# Altium PCB EUS1_Outline_5_trial07_3.PcbDoc
Units mm, origin at the board's own origin, x right, y up, seen from the top; angles counter-clockwise.
Board outline 95.45 x 90.3 mm, 4 copper layers (Top Layer, Signal Layer 1, Ground, Bottom Layer), stack 1.677 mm thick; 247 components, 187 nets, 935 pads, 3 vias.
Unrouted connection lines stored in the file: 629.
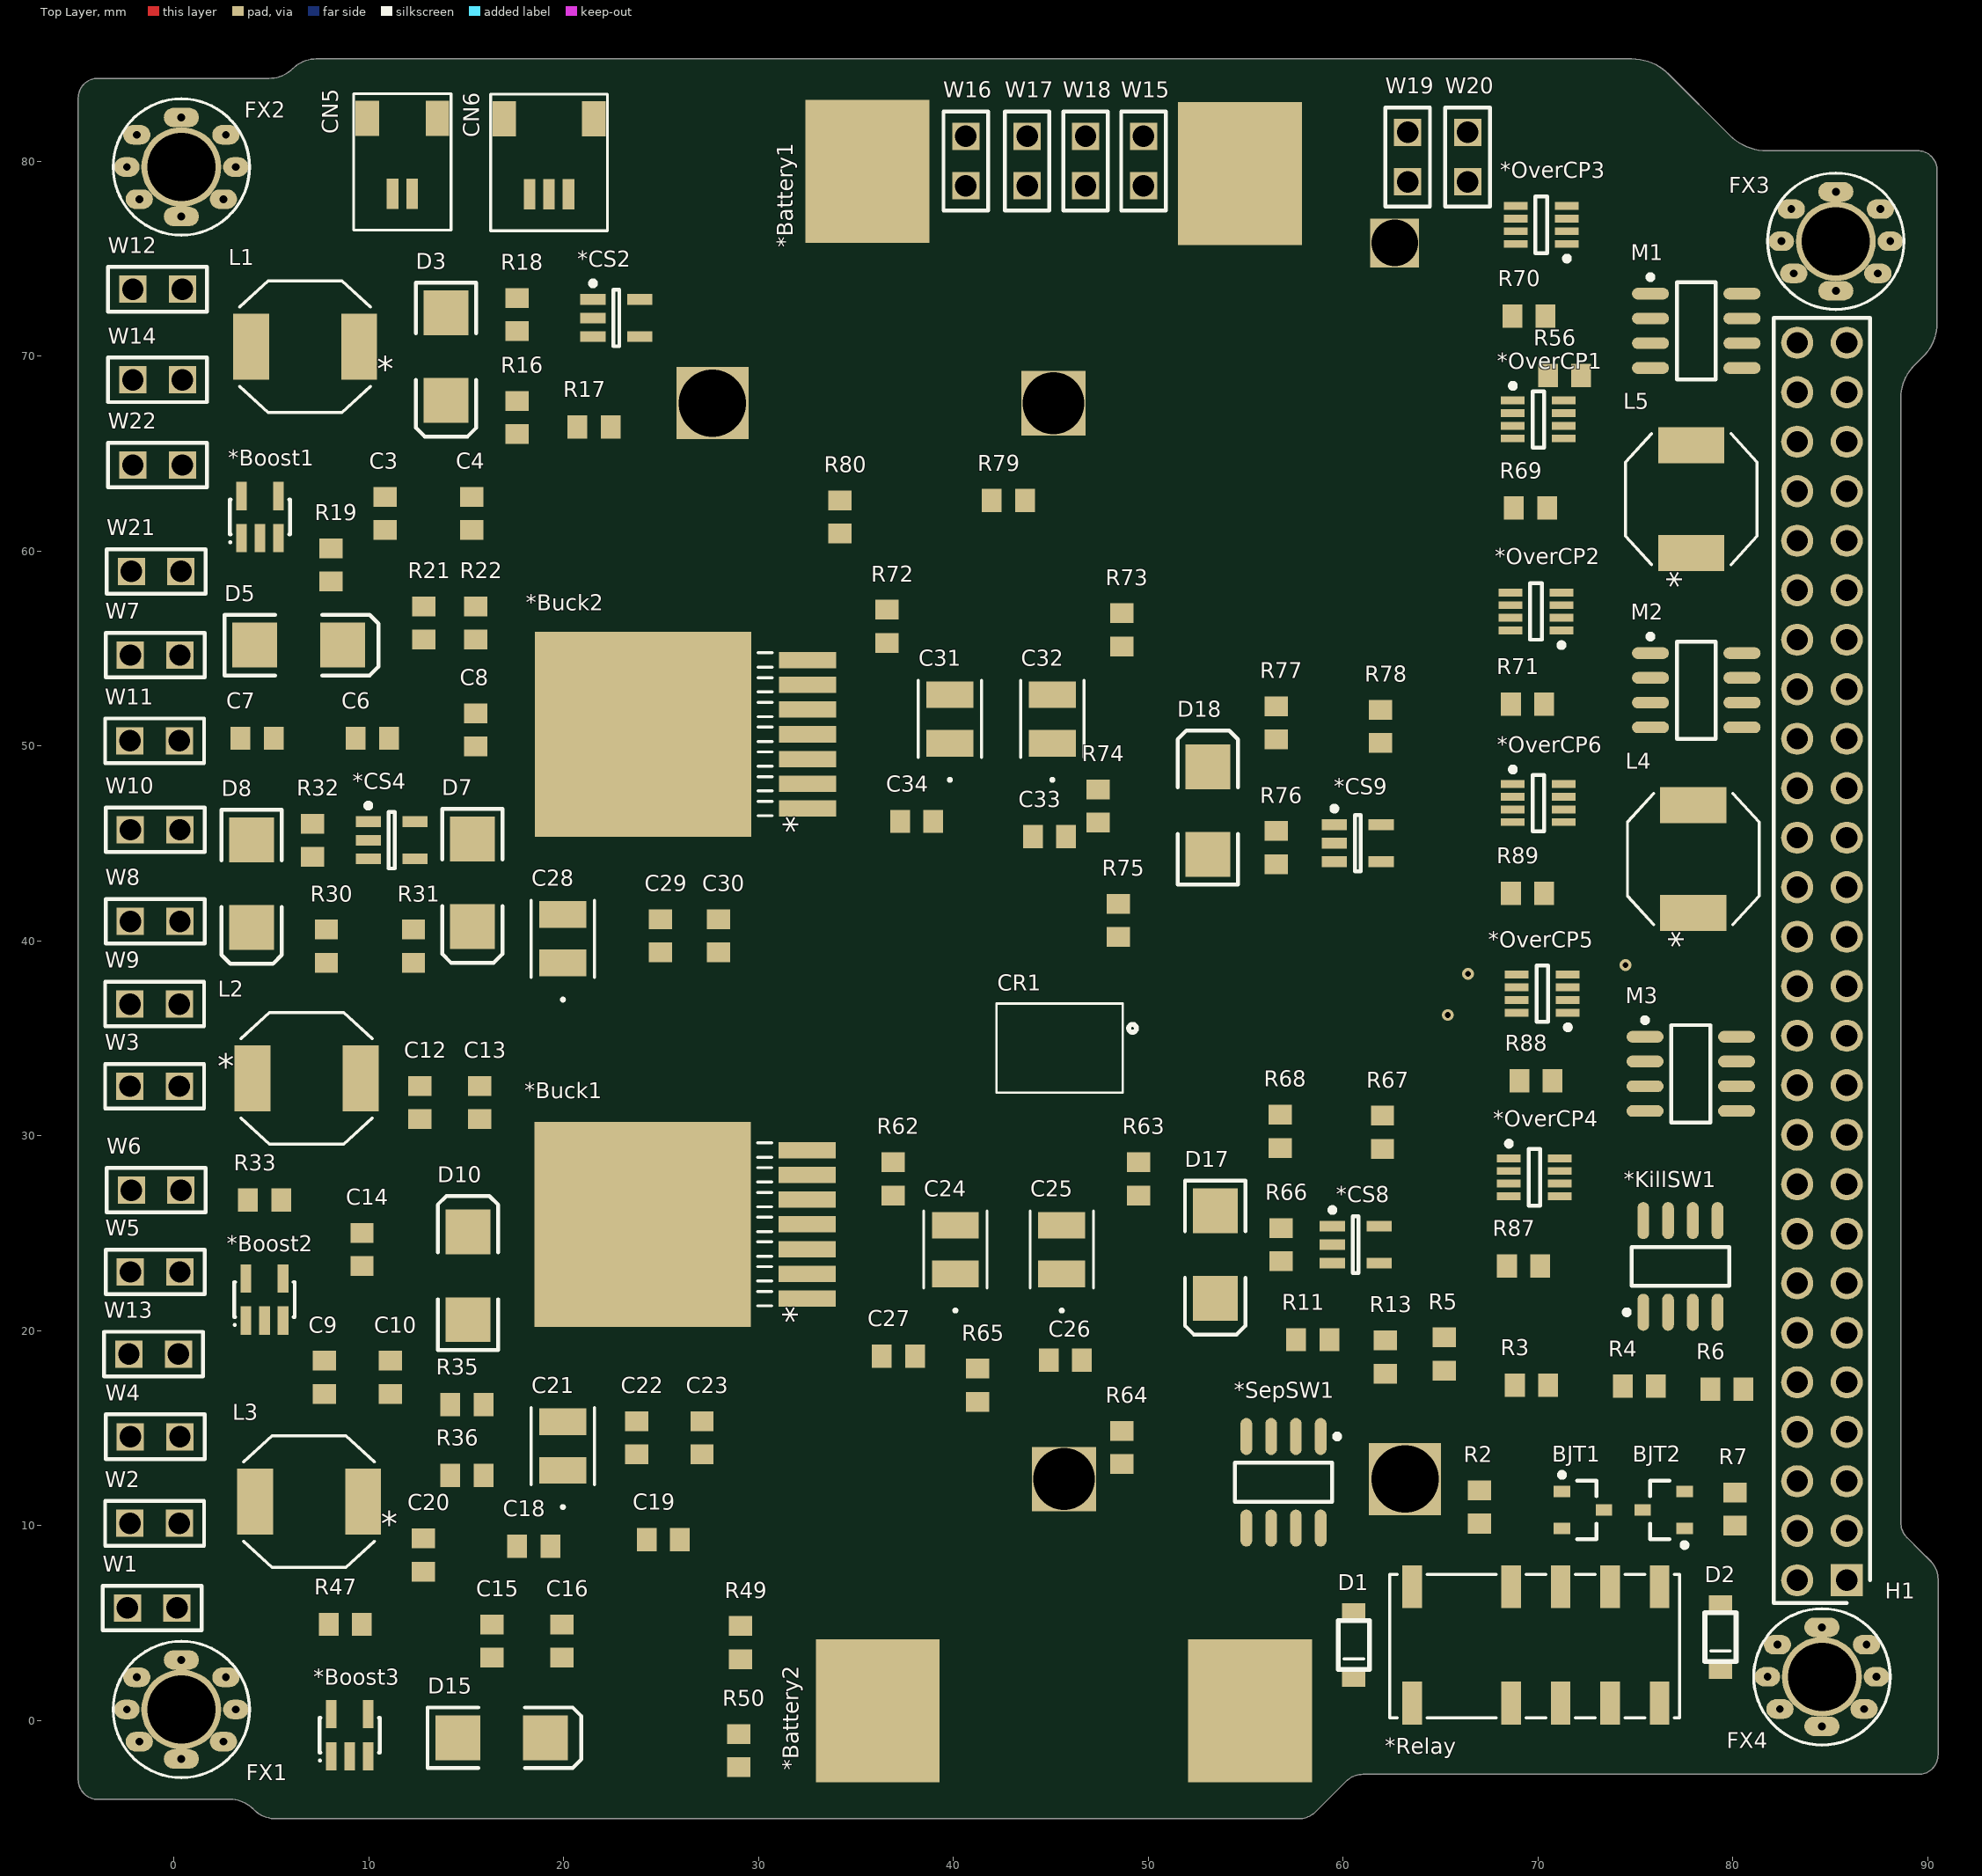
[diagram p0: Top Layer view]
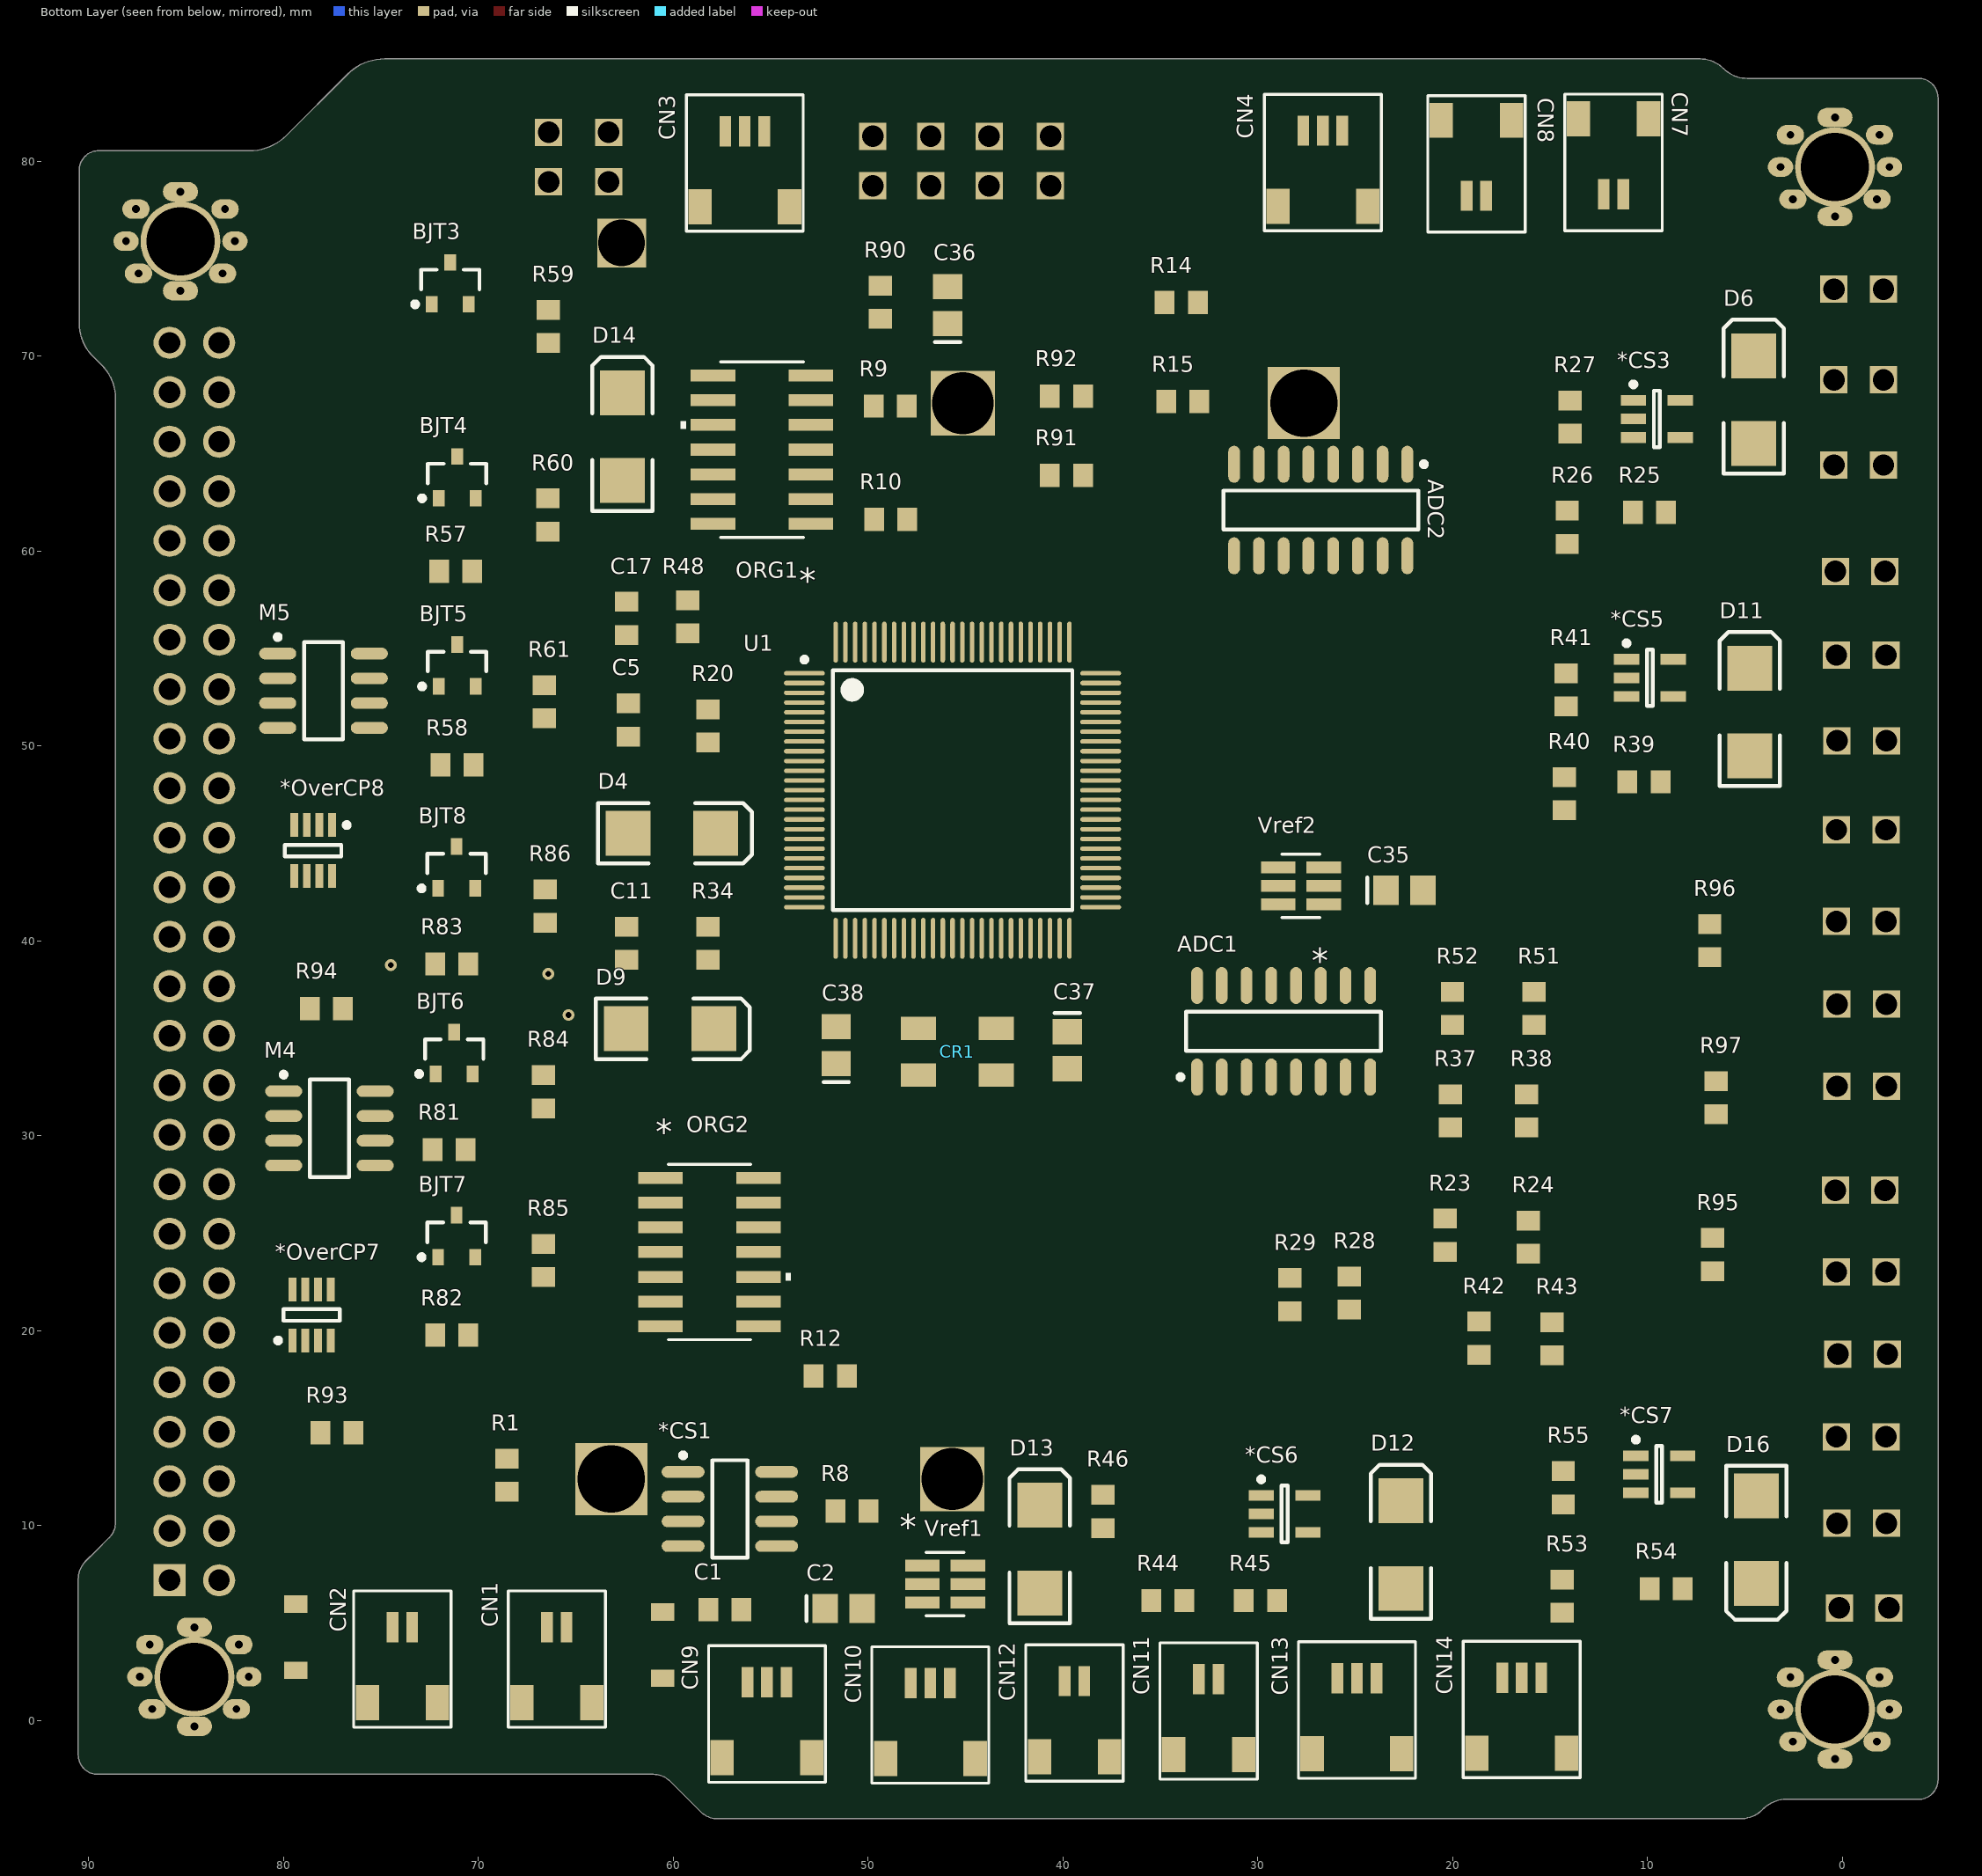
[diagram p1: Bottom Layer view, seen from below]
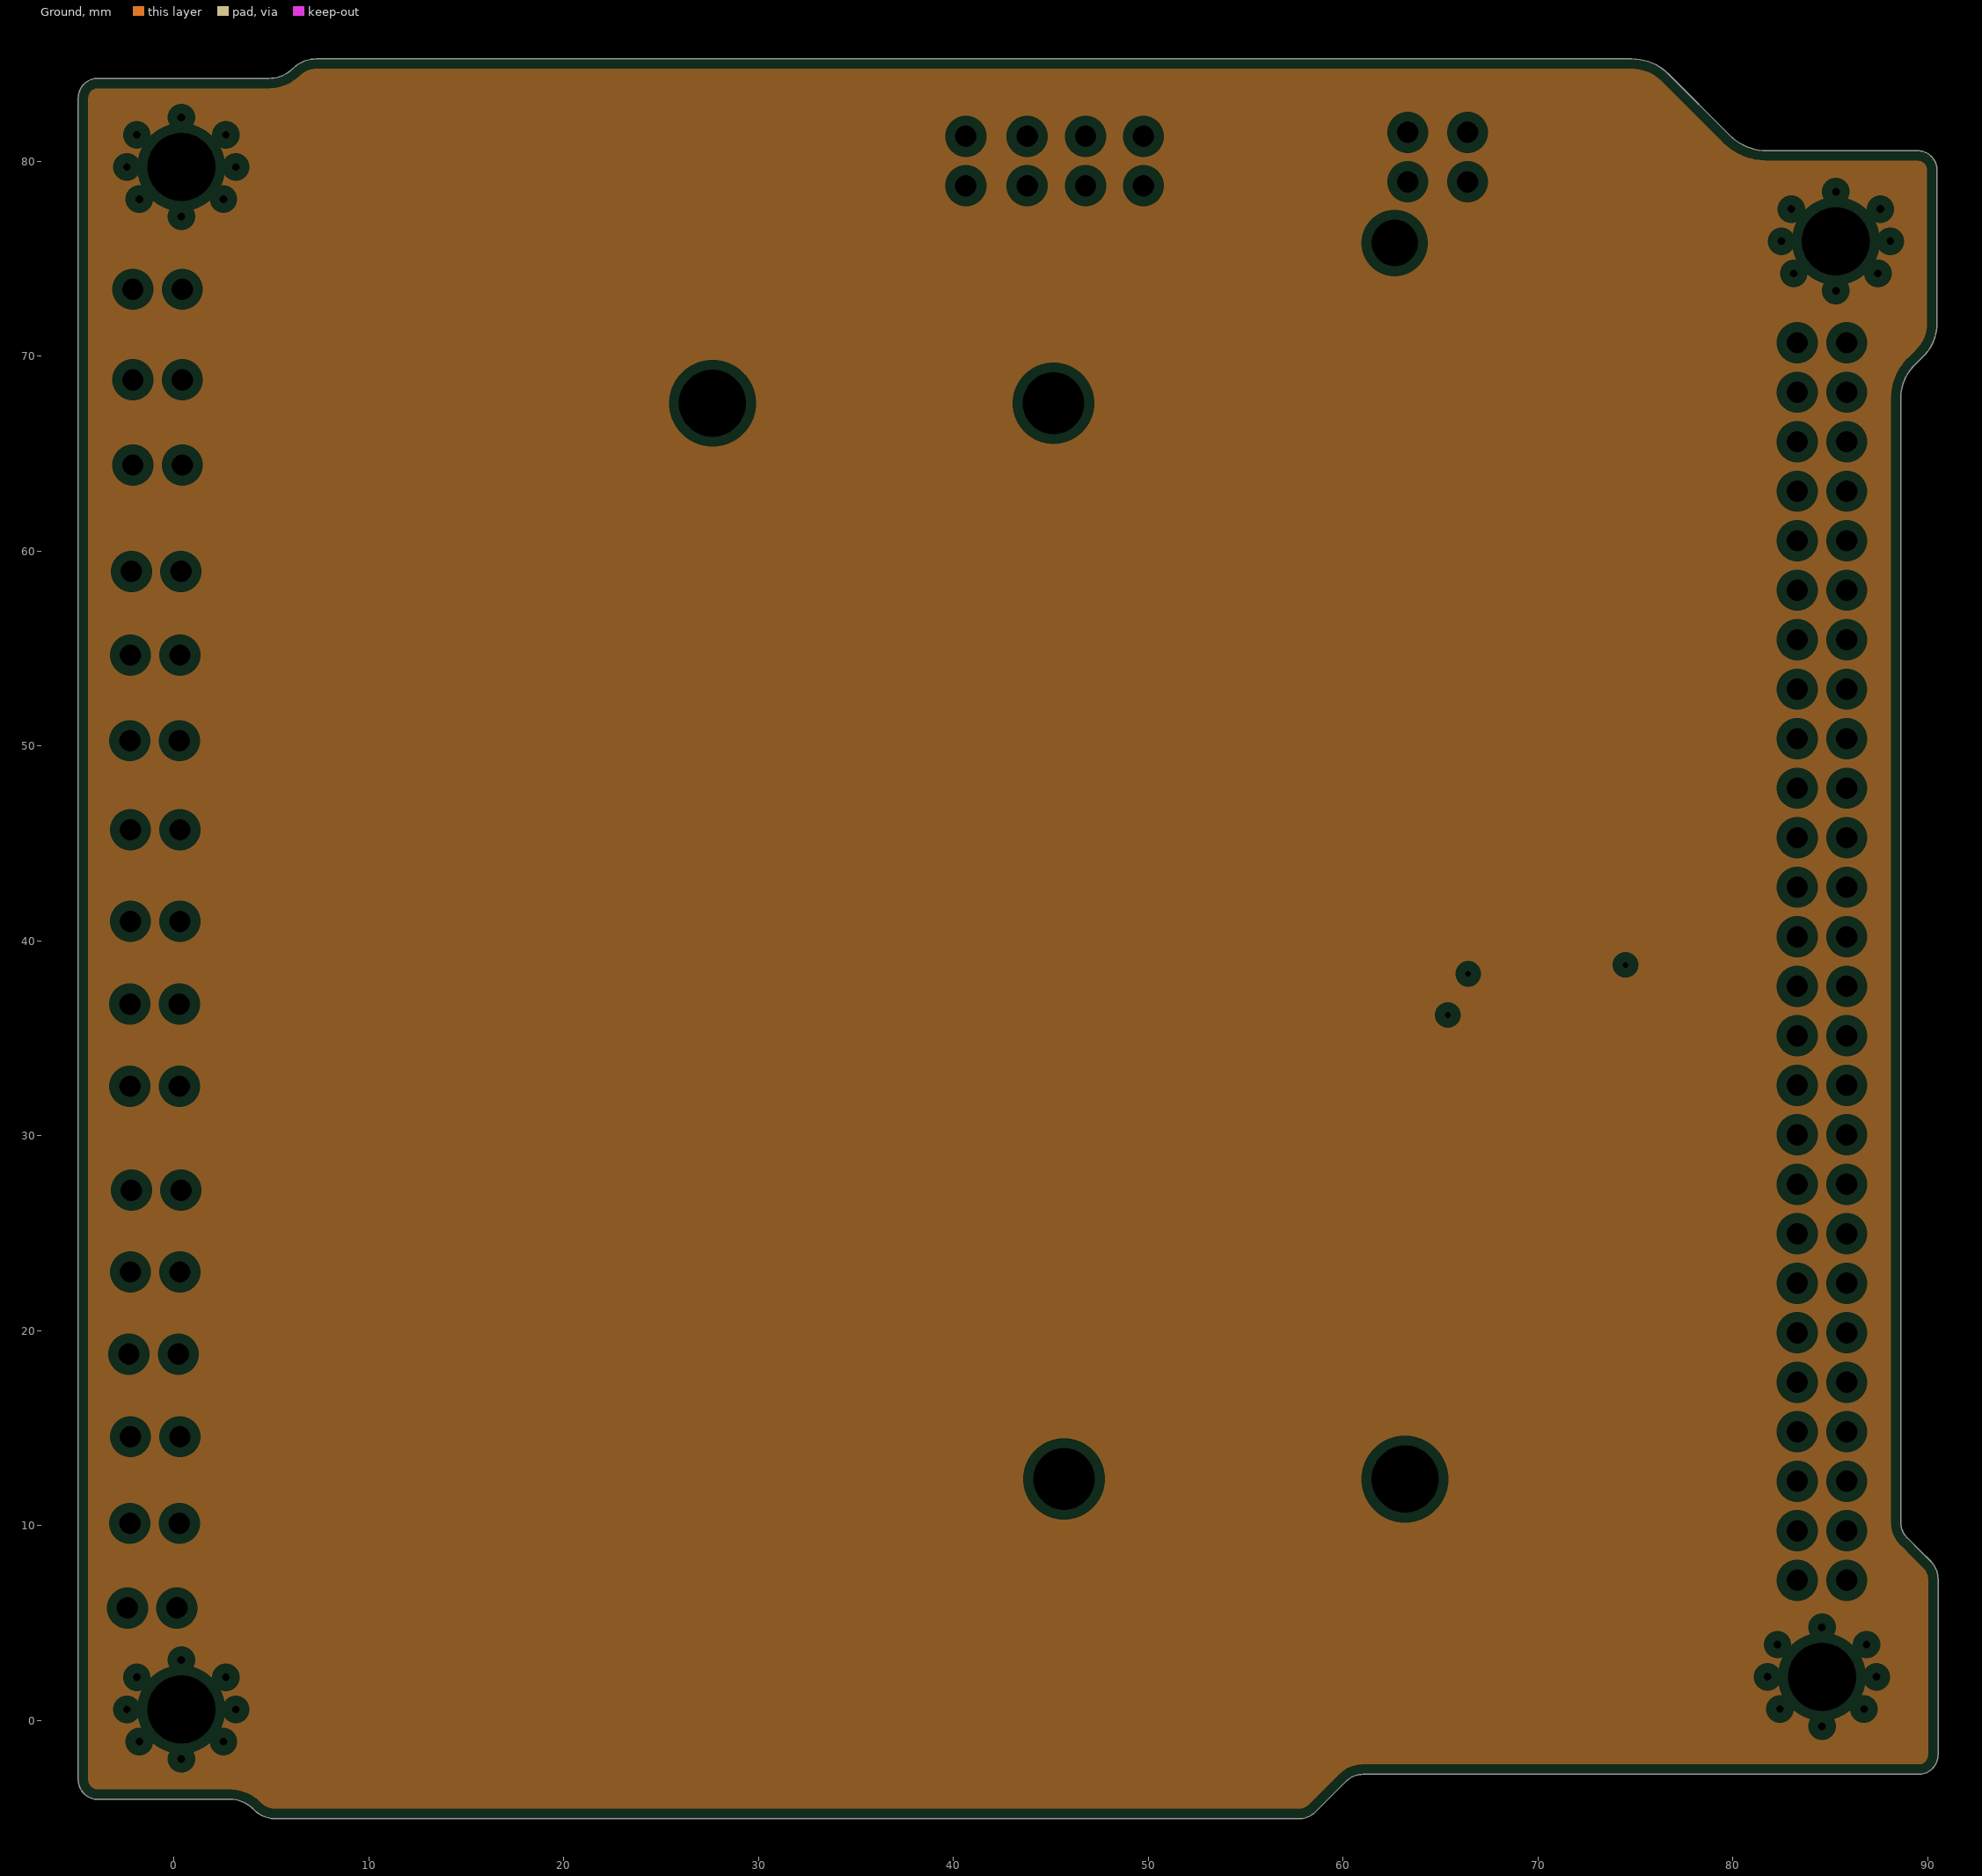
[diagram p2: Ground, clearances drawn from the general rule]

## Layer stack, top to bottom
Top Solder: solder mask 0.0102, Solder Resist, Dk 3.5
Top Layer: signal copper 0.0356
Dielectric 1: prepreg 0.1702, FR-4, Dk 4.35
Signal Layer 1: signal copper 0.036
Dielectric 3: core 1.1938, FR-4, Dk 4.35
Ground: plane copper 0.036
Routing: core 0.1702, FR-4, Dk 4.35
Bottom Layer: signal copper 0.0356
Bottom Solder: solder mask 0.0102, Solder Resist, Dk 3.5

## Board outline
2.9,-4.05 cw(c2.9,-5.668) 4.044,-4.524 4.096,-4.576 ccw(c5.24,-3.432) 5.24,-5.05 57.73,-5.05 ccw(c57.73,-3.831) 58.592,-4.693 60.158,-3.127 cw(c61.02,-3.989) 61.02,-2.77 89.54,-2.77 ccw(c89.54,-1.77) 90.54,-1.77 90.54,7.25 ccw(c89.248,7.25) 90.162,8.163 89.625,8.7 88.952,9.373 cw(c89.728,10.15) 88.63,10.15 88.63,67.85 cw(c90.996,67.85) 89.323,69.523 89.797,69.997 ccw(c88.124,71.67) 90.49,71.67 90.49,79.54 ccw(c89.49,79.54) 89.49,80.54 81.75,80.54 cw(c81.75,83.22) 79.855,81.325 76.715,84.465 ccw(c74.82,82.57) 74.82,85.25 7.302,85.25 ccw(c7.302,83.543) 6.095,84.75 cw(c4.888,85.957) 4.888,84.25 -3.91,84.25 ccw(c-3.91,83.25) -4.91,83.25 -4.91,-3.05 ccw(c-3.91,-3.05) -3.91,-4.05

## Design rules (kind name [scope] priority, off if disabled: settings)
Clearance Clearance_3 [OnLayer('Multi-Layer') vs OnLayer('Multi-Layer')] p1: gap=0.02
ComponentClearance [All] p1 off: gap=0.762 collisioncheckmode=3 verticalgap=0.762 showdistances=FALSE
ComponentClearance ComponentClearance_1 [All] p2 off: gap=0.5 collisioncheckmode=3 verticalgap=0.5 showdistances=FALSE
Height Height_1 [InComponent('CN1')] p2 off: minheight=0 maxheight=100 prefheight=12.7
MinimumSolderMaskSliver [All] p1: minsoldermaskwidth=0.102
PlaneClearance [All] p1: clearance=0.508
PlaneConnect [All] p1: planeconnectstyle=Relief reliefexpansion=0.508 reliefentries=4 reliefconductorwidth=0.254 reliefairgap=0.254
PolygonConnect [All] p1: connectstyle=Relief reliefconductorwidth=0.254 reliefentries=4 polygonreliefangle="90 Angle" airgapwidth=0.254
RoutingVias [All] p1: holewidth=0.305 width=0.61 viastyle="Through Hole" minholewidth=0.254 minwidth=0.254 maxholewidth=0.305 maxwidth=0.61
SilkToSilkClearance [All] p1: silktosilkclearance=0.102
SolderMaskExpansion [All] p1: expansion=0.076
Width [All] p1: maxlimit=1.016 minlimit=0.178 preferedwidth=0.3 minimp=50.000000 maximp=50.000000 favimp=50.000000
25 further rules are at their usual default settings.

## Classes and differential pairs
component class Z_line_07: *Boost3 *CS6 *CS7 C15 C16 C17 C18 C19 C20 CN11 CN12 CN13 CN14 D12 D13 D14 D15 D16 L3 R42 R43 R44 R45 R46 R47 R48 R49 R50 R51 R52 R53 R54 R55 R97 W9 W10
component class Y_line_07: *Boost2 *CS4 *CS5 C9 C10 C11 C12 C13 C14 CN7 CN8 CN9 CN10 D7 D8 D9 D10 D11 L2 R28 R29 R30 R31 R32 R33 R34 R35 R36 R37 R38 R39 R40 R41 R96 W7 W8
component class X_line_07: *Boost1 *CS2 *CS3 C3 C4 C5 C6 C7 C8 CN5 CN6 D3 D4 D5 D6 L1 R14 R15 R16 R17 R18 R19 R20 R21 R22 R23 R24 R25 R26 R27 R95 W5 W6
component class Microcontroller_07: C36 C37 C38 CR1 R90 R91 R92 U1 W15 W16 W17 W18 W19 W20 W21 W22
component class Buck_5V_line_07: *Buck2 *CS9 *OverCP4 *OverCP5 *OverCP6 *OverCP8 BJT6 BJT7 BJT8 C28 C29 C30 C31 C32 C33 C34 D18 L5 M3 M5 ORG2 R72 R73 R74 R75 R76 R77 R78 R79 R80 R81 R82 R83 R84 R85 R86 R87 R88 R89 R94 W13 W14
component class Fixture_07: FX1 FX2 FX3 FX4 H1
component class Buck_3.3V_line_07: *Buck1 *CS8 *OverCP1 *OverCP2 *OverCP3 *OverCP7 BJT3 BJT4 BJT5 C21 C22 C23 C24 C25 C26 C27 D17 L4 M1 M2 M4 ORG1 R56 R57 R58 R59 R60 R61 R62 R63 R64 R65 R66 R67 R68 R69 R70 R71 R93 W11 W12
component class Battery_07: *Battery1 *Battery2 *CS1 *KillSW1 *Relay *SepSW1 BJT1 BJT2 C1 C2 CN1 CN2 CN3 CN4 D1 D2 R1 R2 R3 R4 R5 R6 R7 R8 R9 R10 R11 R12 R13 Vref1 W1 W2 W3 W4
component class ADC_REF_07: ADC1 ADC2 C35 Vref2

## Components (designator, comment, footprint, x,y, rotation, side; value= is the part's Value field where it differs from the comment)
*Battery1 "Battery1" Battery1 67.183,-3.175 r90 top
*Battery2 "Battery2" BATTERY2 66.65,-3.175 r90 top
*Boost1 "LMR6242" DBV005 4.42,61.747 r0 top
*Boost2 "Boost2" DBV005 4.648,21.59 r0 top
*Boost3 "Boost3" DBV005 9.017,-0.762 r0 top
*Buck1 "LM22679" TJ7A-M 24.105,25.451 r90 top
*Buck2 "LM22679" TJ7A-M 24.13,50.597 r90 top
*CS1 "LT1787HVCS8#TRPBF" LT-S8-8_N 57.099,10.846 r180 bottom
*CS2 "CS2" LT-S5-5-TSOT-23_N 22.708,71.958 r0 top
*CS3 "CS3" LT-S5-5-TSOT-23_N 9.525,66.777 r180 bottom
*CS4 "CS4" LT-S5-5-TSOT-23_N 11.176,45.161 r0 top
*CS5 "CS5" LT-S5-5-TSOT-23_N 9.881,53.492 r180 bottom
*CS6 "CS6" LT-S5-5-TSOT-23_N 28.626,10.592 r180 bottom
*CS7 "CS7" LT-S5-5-TSOT-23_N 9.398,12.624 r180 bottom
*CS8 "LT6106HS5#TRMPBF" LT-S5-5-TSOT-23_N 60.655,24.409 r0 top
*CS9 "LT6106HS5#TRMPBF" LT-S5-5-TSOT-23_N 60.757,45.009 r0 top
*KillSW1 "IRF7329TRPBF" SO8_L 77.318,23.292 r90 top
*OverCP1 "LTC4361ITS8-1#TRMPBF" LT-TS8-8-TSOT-23_V 70.028,66.751 r0 top
*OverCP2 "LTC4361ITS8-1#TRMPBF" LT-TS8-8-TSOT-23_V 69.901,56.896 r180 top
*OverCP3 "LTC4361ITS8-1#TRMPBF" LT-TS8-8-TSOT-23_V 70.18,76.733 r180 top
*OverCP4 "LTC4361ITS8-1#TRMPBF" LT-TS8-8-TSOT-23_V 69.825,27.864 r0 top
*OverCP5 "LTC4361ITS8-1#TRMPBF" LT-TS8-8-TSOT-23_V 70.231,37.287 r180 top
*OverCP6 "LTC4361ITS8-1#TRMPBF" LT-TS8-8-TSOT-23_V 70.028,47.066 r0 top
*OverCP7 "LTC4361ITS8-2#TRMPBF" LT-TS8-8-TSOT-23_V 78.562,20.803 r90 bottom
*OverCP8 "LTC4361ITS8-2#TRMPBF" LT-TS8-8-TSOT-23_V 78.486,44.628 r270 bottom
*Relay "G6SK-2G DC3" "G6SK-2G DC3" 63.043,-0.254 r0 top
*SepSW1 "IRF7329TRPBF" SO8_L 56.947,12.217 r270 top
ADC1 "MCP3008T-I/SL" SOIC16_L 28.677,35.357 r90 bottom
ADC2 "MCP3008T-I/SL" SOIC16_L 26.772,62.103 r270 bottom
BJT1 "MMBT2222A" SOT-23A_L 72.314,10.795 r0 top
BJT2 "MMBT2222A" SOT-23A_L 76.454,10.795 r180 top
BJT3 "MMBT2222A" SOT-23A_L 71.45,73.736 r90 bottom
BJT4 "MMBT2222A" SOT-23A_L 71.095,63.779 r90 bottom
BJT5 "MMBT2222A" SOT-23A_L 71.095,54.127 r90 bottom
BJT6 "MMBT2222A" SOT-23A_L 71.247,34.239 r90 bottom
BJT7 "MMBT2222A" SOT-23A_L 71.12,24.841 r90 bottom
BJT8 "MMBT2222A" SOT-23A_L 71.12,43.764 r90 bottom
C1 "GRM188R71H472KA0" RC0805N 57.353,5.69 r0 bottom
C2 "1uF" 0805 51.257,5.74 r180 bottom
C3 "GRM155R71H103KA8" RC0805N 10.846,61.925 r90 top
C4 "22uF" RC0805N 15.291,61.925 r90 top
C5 "220nF" RC0805N 62.306,51.333 r90 bottom
C6 "10uF" RC0805N 10.185,50.394 r0 top
C7 "GRM155R71H103KA8" RC0805N 4.267,50.394 r180 top
C8 "330pF" RC0805N 15.494,50.825 r270 top
C9 "GRM155R71H103KA8" RC0805N 7.722,17.602 r90 top
C10 "22uF" RC0805N 11.1,17.602 r90 top
C11 "220nF" RC0805N 62.408,39.878 r270 bottom
C12 "10uF" RC0805N 12.624,31.699 r270 top
C13 "GRM155R71H103KA8" RC0805N 15.697,31.699 r270 top
C14 "330nF" RC0805N 9.652,24.155 r90 top
C15 "GRM155R71H103KA8" RC0805N 16.332,4.064 r90 top
C16 "22uF" RC0805N 19.914,4.064 r90 top
C17 "100uF" RC0805N 62.408,56.54 r90 bottom
C18 "10uF" RC0805N 18.466,8.941 r180 top
C19 "GRM155R71H103KA8" RC0805N 25.121,9.271 r180 top
C20 "330nF" RC0805N 12.802,8.484 r90 top
C21 "22uF" TAJB 19.964,14.072 r90 top
C22 "10uF" RC0805N 23.749,14.503 r270 top
C23 "10uF" RC0805N 27.102,14.503 r270 top
C24 "100uF" TAJB 40.107,24.155 r90 top
C25 "100uF" TAJB 45.568,24.155 r90 top
C26 "10nF" RC0805N 45.745,18.491 r0 top
C27 "1uF" RC0805N 37.186,18.694 r180 top
C28 "22uF" TAJB 19.964,40.107 r90 top
C29 "10uF" RC0805N 24.968,40.259 r270 top
C30 "10uF" RC0805N 27.94,40.259 r270 top
C31 "100uF" TAJB 39.827,51.384 r90 top
C32 "100uF" TAJB 45.085,51.384 r90 top
C33 "10nF" RC0805N 44.933,45.339 r0 top
C34 "1uF" RC0805N 38.125,46.126 r180 top
C35 "1uF" 0805 22.479,42.596 r180 bottom
C36 "1uF" 0805 45.923,72.619 r90 bottom
C37 "22uF" 0805 39.776,34.392 r270 bottom
C38 "22uF" 0805 51.638,34.646 r90 bottom
CN1 "SM02B-SRSS" 2pins 68.478,-0.356 r180 bottom
CN2 "SM02B-SRSS" 2pins 76.403,-0.356 r180 bottom
CN3 "SM03B-SRSS" 3pins 59.334,76.403 r180 bottom
CN4 "SM03B-SRSS" 3pins 29.667,76.429 r180 bottom
CN5 "SM02B-SRSS" 2pins 14.224,83.464 r180 top
CN6 "SM03B-SRSS" 3pins 22.25,83.439 r180 top
CN7 "SM02B-SRSS" 2pins 9.246,83.439 r0 bottom
CN8 "SM02B-SRSS" 2pins 16.281,83.363 r0 bottom
CN9 "SM03B-SRSS" 3pins 58.191,-3.175 r180 bottom
CN10 "SM03B-SRSS" 3pins 49.809,-3.226 r180 bottom
CN11 "SM02B-SRSS" 2pins 35.027,-3.023 r180 bottom
CN12 "SM02B-SRSS" 2pins 41.91,-3.124 r180 bottom
CN13 "SM03B-SRSS" 3pins 27.915,-2.972 r180 bottom
CN14 "SM03B-SRSS" 3pins 19.456,-2.946 r180 bottom
CR1 "ABM3B-16.000MHZ" Crystal 47.422,35.509 r180 top
D1 "MMSD459A" GeneralDiode 60.554,5.563 r180 top
D2 "MMSD459A" GeneralDiode 79.375,5.969 r180 top
D3 "D Schottky" SMB 13.97,69.977 r270 top
D4 "D Schottky" SMB 60.071,45.517 r180 bottom
D5 "D Schottky" SMB 6.401,55.169 r0 top
D6 "D Schottky" SMB 4.547,67.767 r90 bottom
D7 "D Schottky" SMB 15.316,42.977 r270 top
D8 "D Schottky" SMB 3.988,42.926 r270 top
D9 "D Schottky" SMB 60.173,35.484 r180 bottom
D10 "D Schottky" SMB 15.088,22.809 r90 top
D11 "D Schottky" SMB 4.75,51.74 r90 bottom
D12 "D Schottky" SMB 22.657,9.017 r90 bottom
D13 "D Schottky" SMB 41.199,8.788 r90 bottom
D14 "D Schottky" SMB 62.611,65.862 r90 bottom
D15 "D Schottky" SMB 16.815,-0.889 r0 top
D16 "D Schottky" SMB 4.42,9.271 r270 bottom
D17 "D Schottky" SMB 53.442,23.901 r270 top
D18 "D Schottky" SMB 53.061,46.685 r90 top
FX1 "Fixure Hole" FixureHole 0.381,0.559 r0 top
FX2 "Fixure Hole" FixureHole 0.381,79.705 r0 top
FX3 "Fixure Hole" FixureHole 85.293,75.895 r0 top
FX4 "Fixure Hole" FixureHole 84.582,2.235 r0 top
H1 "ESQ12014GD" ? 85.852,7.188 r90 top (schematic designator B1)
L1 "4.7uH" IND_SPM6530 6.731,70.485 r180 top
L2 "4.7uF" IND_SPM6530 6.807,32.944 r0 top
L3 "4.7uF" IND_SPM6530 6.934,11.227 r180 top
L4 "4.7uH" IND_SPM6530 77.978,44.196 r90 top
L5 "4.7uH" IND_SPM6530 77.876,62.662 r90 top
M1 "IRF7329TRPBF" SO8_L 78.13,71.298 r0 top
M2 "IRF7329TRPBF" SO8_L 78.13,52.857 r0 top
M3 "IRF7329TRPBF" SO8_L 77.851,33.172 r0 top
M4 "IRF7329TRPBF" SO8_L 77.648,30.378 r180 bottom
M5 "IRF7329TRPBF" SO8_L 77.953,52.832 r180 bottom
ORG1 "SN74LV32ADR" D14-M 55.448,65.202 r0 bottom
ORG2 "SN74LV32ADR" D14-M 58.141,24.028 r180 bottom
R1 "330" RC0805N 68.529,12.573 r90 bottom
R2 "10K" RC0805N 67.005,10.947 r90 top
R3 "10K" RC0805N 69.672,17.196 r180 top
R4 "10K" RC0805N 75.209,17.145 r0 top
R5 "10K" RC0805N 65.202,18.796 r270 top
R6 "10K" RC0805N 79.705,16.993 r180 top
R7 "10K" RC0805N 80.112,10.846 r90 top
R8 "330" RC0805N 50.825,10.744 r180 bottom
R9 "4.7K" RC0805N 48.87,67.437 r180 bottom
R10 "4.7K" RC0805N 48.844,61.62 r0 bottom
R11 "100K" RC0805N 58.445,19.533 r180 top
R12 "R_sense" RC0805N 51.943,17.678 r180 bottom
R13 "100K" RC0805N 62.179,18.644 r90 top
R14 "RC0805FR" RC0805N 33.934,72.746 r0 bottom
R15 "RC0805FR" RC0805N 33.858,67.666 r180 bottom
R16 "1K" RC0805N 17.602,66.853 r270 top
R17 "R_sense" RC0805N 21.565,66.37 r180 top
R18 "1K" RC0805N 17.602,72.136 r270 top
R19 "1M" RC0805N 8.052,59.284 r270 top
R20 "RC0805FR" RC0805N 58.217,51.029 r270 bottom
R21 "51K" RC0805N 12.827,56.312 r90 top
R22 "10K" RC0805N 15.494,56.312 r90 top
R23 "4.7K" RC0805N 20.396,24.892 r270 bottom
R24 "4.7K" RC0805N 16.129,24.79 r90 bottom
R25 "RC0805FR" RC0805N 9.906,61.976 r180 bottom
R26 "RL0805FR-070R1L" RC0805N 14.122,61.214 r270 bottom
R27 "RC0805FR" RC0805N 13.97,66.878 r270 bottom
R28 "RC0805FR" RC0805N 25.298,21.92 r90 bottom
R29 "RC0805FR" RC0805N 28.346,21.844 r90 bottom
R30 "RC0805FR" RC0805N 7.823,39.726 r270 top
R31 "RL0805FR-070R1L" RC0805N 12.294,39.726 r270 top
R32 "RC0805FR" RC0805N 7.112,45.161 r270 top
R33 "10K" RC0805N 4.648,26.695 r180 top
R34 "RC0805FR" RC0805N 58.217,39.878 r270 bottom
R35 "260K" RC0805N 15.037,16.205 r180 top
R36 "47K" RC0805N 15.037,12.573 r180 top
R37 "4.7K" RC0805N 20.117,31.267 r90 bottom
R38 "4.7K" RC0805N 16.205,31.267 r270 bottom
R39 "RC0805FR" RC0805N 10.185,48.158 r180 bottom
R40 "RL0805FR-070R1L" RC0805N 14.275,47.549 r270 bottom
R41 "RC0805FR" RC0805N 14.173,52.883 r270 bottom
R42 "RC0805FR" RC0805N 18.644,19.609 r90 bottom
R43 "RC0805FR" RC0805N 14.91,19.583 r270 bottom
R44 "RC0805FR" RC0805N 34.62,6.147 r180 bottom
R45 "RL0805FR-070R1L" RC0805N 29.87,6.147 r0 bottom
R46 "RC0805FR" RC0805N 37.948,10.719 r270 bottom
R47 "10K" RC0805N 8.788,4.928 r180 top
R48 "RC0805FR" RC0805N 59.258,56.617 r90 bottom
R49 "260K" RC0805N 29.083,3.988 r270 top
R50 "47K" RC0805N 28.981,-1.549 r90 top
R51 "4.7K" RC0805N 15.824,36.525 r90 bottom
R52 "4.7K" RC0805N 20.015,36.525 r270 bottom
R53 "RC0805FR" RC0805N 14.376,6.375 r270 bottom
R54 "RL0805FR-070R1L" RC0805N 9.042,6.756 r0 bottom
R55 "RC0805FR" RC0805N 14.326,11.938 r270 bottom
R56 "1K" RC0805N 71.374,69.012 r180 top
R57 "1K" RC0805N 71.171,58.953 r180 bottom
R58 "1K" RC0805N 71.095,49.022 r180 bottom
R59 "10K" RC0805N 66.421,71.526 r90 bottom
R60 "10K" RC0805N 66.446,61.849 r90 bottom
R61 "10K" RC0805N 66.624,52.273 r90 bottom
R62 "10K" RC0805N 36.906,27.788 r90 top
R63 "1K" RC0805N 49.505,27.788 r270 top
R64 "1.6K" RC0805N 48.641,13.995 r90 top
R65 "150" RC0805N 41.25,17.196 r90 top
R66 "1K" RC0805N 56.82,24.409 r90 top
R67 "R_sense" RC0805N 62.027,30.175 r90 top
R68 "1K" RC0805N 56.769,30.226 r90 top
R69 "RL0805FR-070R1L" RC0805N 69.621,62.205 r180 top
R70 "RL0805FR-070R1L" RC0805N 69.545,72.06 r0 top
R71 "RL0805FR-070R1L" RC0805N 69.469,52.146 r0 top
R72 "10K" RC0805N 36.601,56.134 r90 top
R73 "1K" RC0805N 48.641,55.956 r90 top
R74 "3K" RC0805N 47.422,46.914 r90 top
R75 "150" RC0805N 48.463,41.046 r90 top
R76 "1K" RC0805N 56.566,44.78 r90 top
R77 "R_sense" RC0805N 56.566,51.181 r90 top
R78 "1K" RC0805N 61.925,51.003 r270 top
R79 "4.7K" RC0805N 42.824,62.586 r180 top
R80 "15K" RC0805N 34.188,61.747 r270 top
R81 "1K" RC0805N 71.501,29.286 r180 bottom
R82 "1K" RC0805N 71.374,19.761 r180 bottom
R83 "1K" RC0805N 71.374,38.811 r180 bottom
R84 "10K" RC0805N 66.675,32.258 r270 bottom
R85 "10K" RC0805N 66.675,23.597 r270 bottom
R86 "10K" RC0805N 66.573,41.783 r270 bottom
R87 "RL0805FR-070R1L" RC0805N 69.266,23.317 r180 top
R88 "RL0805FR-070R1L" RC0805N 69.901,32.817 r0 top
R89 "RL0805FR-070R1L" RC0805N 69.469,42.443 r180 top
R90 "10K" RC0805N 49.378,72.771 r90 bottom
R91 "10K" RC0805N 39.827,63.881 r0 bottom
R92 "10K" RC0805N 39.827,67.945 r0 bottom
R93 "RL0805FR-070R1L" RC0805N 77.267,14.757 r0 bottom
R94 "RL0805FR-070R1L" RC0805N 77.8,36.525 r180 bottom
R95 "51K" RC0805N 6.655,23.901 r270 bottom
R96 "51K" RC0805N 6.807,40.005 r90 bottom
R97 "51K" RC0805N 6.477,31.953 r90 bottom
U1 "ATmega2560-16AU" 100A_M 45.669,47.727 r180 bottom
Vref1 "ADR3450ARJZ-R2" RJ_6-M 46.05,6.985 r180 bottom
Vref2 "ADR3450ARJZ-R2" RJ_6-M 27.788,42.824 r0 bottom
W1 "Jumper" RAD-0.1 -1.118,5.766 r0 top
W2 "Jumper" RAD-0.1 -0.991,10.109 r0 top
W3 "Jumper" RAD-0.1 -0.991,32.537 r0 top
W4 "Jumper" RAD-0.1 -0.965,14.554 r0 top
W5 "Jumper" RAD-0.1 -0.965,23.012 r180 top
W6 "Jumper" RAD-0.1 -0.914,27.203 r180 top
W7 "Jumper" RAD-0.1 -0.965,54.661 r180 top
W8 "Jumper" RAD-0.1 -0.965,40.996 r180 top
W9 "Jumper" RAD-0.1 -0.991,36.754 r0 top
W10 "Jumper" RAD-0.1 -0.965,45.695 r180 top
W11 "Jumper" RAD-0.1 -0.991,50.267 r0 top
W12 "Jumper" RAD-0.1 -0.838,73.431 r180 top
W13 "Jumper" RAD-0.1 -1.041,18.796 r0 top
W14 "Jumper" RAD-0.1 -0.838,68.783 r0 top
W15 "Jumper" RAD-0.1 49.759,80.01 r270 top
W16 "Jumper" RAD-0.1 40.64,80.01 r90 top
W17 "Jumper" RAD-0.1 43.79,80.01 r90 top
W18 "Jumper" RAD-0.1 46.787,80.01 r90 top
W19 "Jumper" RAD-0.1 63.322,80.213 r90 top
W20 "Jumper" RAD-0.1 66.396,80.213 r270 top
W21 "Jumper" RAD-0.1 -0.914,58.953 r0 top
W22 "Jumper" RAD-0.1 -0.838,64.414 r0 top

## Footprints (in the part's own frame and the unit in brackets; to place one, negate y for a bottom-side part, rotate by r counter-clockwise, add the part's x,y. Pads: shape width x height; smd on the part's side, far side on the other; paste and mask are expansions set on the pad)
2pins [mm]
  rect 0.6x1.55 smd: 1(2,5.137) 2(3,5.137)
  rect 1.2x1.8 smd: 3(0.7,1.263) 4(4.3,1.263)
  silkscreen extent 0,0 5,7
3pins [mm]
  rect 0.6x1.55 smd: 1(2,5.137) 2(3,5.137) 3(4,5.137)
  rect 1.2x1.8 smd: 4(0.7,1.263) 5(5.3,1.263)
  silkscreen extent 0,0 6,7
100A_M [mm]
  oval 2.1x0.23 smd: 1(-7.6,6) 2(-7.6,5.5) 3(-7.6,5) 4(-7.6,4.5) 5(-7.6,4) 6(-7.6,3.5) 7(-7.6,3) 8(-7.6,2.5) 9(-7.6,2) 10(-7.6,1.5) 11(-7.6,1) 12(-7.6,0.5) 13(-7.6,0) 14(-7.6,-0.5) 15(-7.6,-1) 16(-7.6,-1.5) 17(-7.6,-2) 18(-7.6,-2.5) 19(-7.6,-3) 20(-7.6,-3.5) 21(-7.6,-4) 22(-7.6,-4.5) 23(-7.6,-5) 24(-7.6,-5.5) 25(-7.6,-6) 51(7.6,-6) 52(7.6,-5.5) 53(7.6,-5) 54(7.6,-4.5) 55(7.6,-4) 56(7.6,-3.5) 57(7.6,-3) 58(7.6,-2.5) 59(7.6,-2) 60(7.6,-1.5) 61(7.6,-1) 62(7.6,-0.5) 63(7.6,0) 64(7.6,0.5) 65(7.6,1) 66(7.6,1.5) 67(7.6,2) 68(7.6,2.5) 69(7.6,3) 70(7.6,3.5) 71(7.6,4) 72(7.6,4.5) 73(7.6,5) 74(7.6,5.5) 75(7.6,6)
  oval 0.23x2.1 smd: 26(-6,-7.6) 27(-5.5,-7.6) 28(-5,-7.6) 29(-4.5,-7.6) 30(-4,-7.6) 31(-3.5,-7.6) 32(-3,-7.6) 33(-2.5,-7.6) 34(-2,-7.6) 35(-1.5,-7.6) 36(-1,-7.6) 37(-0.5,-7.6) 38(0,-7.6) 39(0.5,-7.6) 40(1,-7.6) 41(1.5,-7.6) 42(2,-7.6) 43(2.5,-7.6) 44(3,-7.6) 45(3.5,-7.6) 46(4,-7.6) 47(4.5,-7.6) 48(5,-7.6) 49(5.5,-7.6) 50(6,-7.6) 76(6,7.6) 77(5.5,7.6) 78(5,7.6) 79(4.5,7.6) 80(4,7.6) 81(3.5,7.6) 82(3,7.6) 83(2.5,7.6) 84(2,7.6) 85(1.5,7.6) 86(1,7.6) 87(0.5,7.6) 88(0,7.6) 89(-0.5,7.6) 90(-1,7.6) 91(-1.5,7.6) 92(-2,7.6) 93(-2.5,7.6) 94(-3,7.6) 95(-3.5,7.6) 96(-4,7.6) 97(-4.5,7.6) 98(-5,7.6) 99(-5.5,7.6) 100(-6,7.6)
  silkscreen extent -7.73,-6.15 6.15,6.82, body extent -7,-7 7,7, height 1.2
0805 [mm]
  rect 1.3x1.5 smd: 1(-0.95,0) 2(0.95,0)
  silkscreen extent -1.9,-0.65 -1.9,0.65
Battery1 [mm]
  rect 7.34x6.35 smd: 1(3.67,31.06) 2(3.67,11.95)
  rect 3.7x3.7 hole 3.45: 3(15.56,4)
  rect 3.3x3.3 hole 3.17: 4(15.56,21.505)
BATTERY2 [mm]
  rect 7.34x6.35 smd: 3(82.65,31.06) 4(82.55,11.938)
  rect 2.5x2.5 hole 2.39: 5(78.98,4)
  rect 3.3x3.3 hole 3.17: 6(70.76,21.505)
  rect 3.7x3.7 hole 3.45: 7(70.76,39.01)
Crystal [mm]
  rect 1.8x1.2 smd far side: 1(0,0) 2(4,0) 3(4,2.4) 4(0,2.4)
  silkscreen extent -1.98,-1.27 5.21,3.3
D14-M [mil]
  rect 90x24 smd: 1(-99,150) 2(-99,100) 3(-99,50) 4(-99,0) 5(-99,-50) 6(-99,-100) 7(-99,-150) 8(99,-150) 9(99,-100) 10(99,-50) 11(99,0) 12(99,50) 13(99,100) 14(99,150)
  silkscreen extent -83,-177 164,177, body extent 0,0 10,10, height 10
DBV005 [mm]
  rect 0.55x1.45 smd: 1(-0.95,-1.075) 2(0,-1.075) 3(0.95,-1.075) 4(0.95,1.075) 5(-0.95,1.075)
  silkscreen extent -1.57,-1.35 1.55,0.9
FixureHole [mm]
  round 4.1 hole 3.5: 1(0,0)
  oval 1.4x1 hole 0.4: 2(-2.286,1.651) 4(-2.159,-1.651) 6(2.159,-1.651) 8(2.286,1.651)
  oval 1.3x1 hole 0.4: 3(-2.794,0) 7(2.794,0)
  oval 1.8x1 hole 0.4: 5(0,-2.54) 9(0,2.54)
  silkscreen extent -3.5,-3.5 3.5,3.5
"G6SK-2G DC3" [mm] "RELAY TELECOM DPDT 2A 3V"
  rect 1x2.2 smd: 1(0.508,1.143) 2(0.508,7.112) 3(5.588,1.143) 4(8.128,1.143) 5(10.668,1.143) 6(13.208,1.143) 7(13.208,7.112) 8(10.668,7.112) 9(8.128,7.112) 10(5.588,7.112)
  silkscreen extent -0.63,0.38 14.22,7.75
GeneralDiode [mm]
  rect 1.2x0.9 all layers, no hole: 1(0,0) 2(0,3.4)
  silkscreen extent -0.8,0.45 0.8,2.95
IND_SPM6530 [mm]
  rect 1.85x3.4 smd: 1(-2.775,0) 2(2.775,0)
  silkscreen extent -3.37,-3.38 3.37,3.38, body extent 0,0 0.25,0.25, height 0.25
LT-S5-5-TSOT-23_N [mm]
  rect 1.3x0.55 smd: 1(-1.2,0.95) 2(-1.2,0) 3(-1.2,-0.95) 4(1.2,-0.95) 5(1.2,0.95)
  silkscreen extent -1.32,-1.45 0.15,1.9, body extent -0.87,-1.45 0.87,1.45, height 1
LT-S8-8_N [mm]
  oval 2.2x0.6 smd: 1(-2.4,1.905) 2(-2.4,0.635) 3(-2.4,-0.635) 4(-2.4,-1.905) 5(2.4,-1.905) 6(2.4,-0.635) 7(2.4,0.635) 8(2.4,1.905)
  silkscreen extent -2.53,-2.5 0.9,2.88, body extent -2,-2.5 2,2.5, height 1.76
LT-TS8-8-TSOT-23_V [mm]
  rect 1.22x0.4 smd: 1(-1.31,0.975) 2(-1.31,0.325) 3(-1.31,-0.325) 4(-1.31,-0.975) 5(1.31,-0.975) 6(1.31,-0.325) 7(1.31,0.325) 8(1.31,0.975)
  silkscreen extent -1.43,-1.45 0.3,1.85, body extent -0.87,-1.45 0.88,1.45, height 1
RAD-0.1 [mm] "Radial Cap, Thru-Hole; 2 Leads; 0.1 in Pin Spacing"
  rect 1.4x1.4 hole 1.1: 1(-1.27,0) 2(1.27,0)
  silkscreen extent -2.54,-1.14 2.54,1.14
RC0805N [mil]
  rect 40x47 smd: 1(-33.5,0) 2(33.5,0)
  body extent 0,0 10,10, height 10
RJ_6-M [mil]
  rect 70x24 smd: 1(-46,37.4) 2(-46,0) 3(-46,-37.4) 4(46,-37.4) 5(46,0) 6(46,37.4)
  silkscreen extent -39,-64 38,64, body extent 0,0 10,10, height 10
SMB [mm]
  rect 2.3x2.3 smd: 1(-2.25,0) 2(2.25,0)
  silkscreen extent -3.8,-1.55 4.1,1.55
SO8_L [mm]
  oval 1.9x0.6 smd: 1(-2.35,1.905) 2(-2.35,0.635) 3(-2.35,-0.635) 4(-2.35,-1.905) 5(2.35,-1.905) 6(2.35,-0.635) 7(2.35,0.635) 8(2.35,1.905)
  silkscreen extent -2.47,-2.5 1,2.88, body extent -2,-2.5 2,2.5, height 1.75
SOIC16_L [mm]
  oval 1.9x0.6 smd: 1(-2.35,4.445) 2(-2.35,3.175) 3(-2.35,1.905) 4(-2.35,0.635) 5(-2.35,-0.635) 6(-2.35,-1.905) 7(-2.35,-3.175) 8(-2.35,-4.445) 9(2.35,-4.445) 10(2.35,-3.175) 11(2.35,-1.905) 12(2.35,-0.635) 13(2.35,0.635) 14(2.35,1.905) 15(2.35,3.175) 16(2.35,4.445)
  silkscreen extent -2.47,-5 1,5.42, body extent -2,-5 2,5, height 1.91
SOT-23A_L [mm]
  rect 0.85x0.6 smd: 1(-1.075,0.95) 2(-1.075,-0.95) 3(1.075,0)
  silkscreen extent -1.2,-1.5 0.7,1.92, body extent -0.7,-1.5 0.7,1.5, height 1.09
TAJB [mil]
  rect 54x95 smd: 1(-49,0) 2(49,0)
  silkscreen extent -126,-64 78,64, body extent 0,0 10,10, height 10
TJ7A-M [mil]
  rect 33x115 smd: 1(-150,-330.5) 2(-100,-330.5) 3(-50,-330.5) 4(0,-330.5) 5(50,-330.5) 6(100,-330.5) 7(150,-330.5)
  rect 414x438 smd: 8(0,2)
  silkscreen extent -165,-259 164,-230, body extent 0,0 10,10, height 10
? [mm]
  rect 1.65x1.65 / inner round 1.65 / far side rect 1.65x1.65 hole 1.1: 1(0,0)
  round 1.65 hole 1.1: 2(0,2.54) 3(2.54,0) 4(2.54,2.54) 5(5.08,0) 6(5.08,2.54) 7(7.62,0) 8(7.62,2.54) 9(10.16,0) 10(10.16,2.54) 11(12.7,0) 12(12.7,2.54) 13(15.24,0) 14(15.24,2.54) 15(17.78,0) 16(17.78,2.54) 17(20.32,0) 18(20.32,2.54) 19(22.86,0) 20(22.86,2.54) 21(25.4,0) 22(25.4,2.54) 23(27.94,0) 24(27.94,2.54) 25(30.48,0) 26(30.48,2.54) 27(33.02,0) 28(33.02,2.54) 29(35.56,0) 30(35.56,2.54) 30(35.56,2.54) 31(38.1,0) 32(38.1,2.54) 32(38.1,2.54) 33(40.64,0) 34(40.64,2.54) 34(40.64,2.54) 35(43.18,0) 36(43.18,2.54) 36(43.18,2.54) 37(45.72,0) 38(45.72,2.54) 38(45.72,2.54) 39(48.26,0) 40(48.26,2.54) 40(48.26,2.54) 41(50.8,0) 42(50.8,2.54) 43(53.34,0) 44(53.34,2.54) 45(55.88,0) 46(55.88,2.54) 47(58.42,0) 48(58.42,2.54) 49(60.96,0) 50(60.96,2.54) 51(63.5,0) 52(63.5,2.54)
  silkscreen extent -1.17,-1.2 64.77,3.75

## Part data
*Boost1 *Boost2 *Boost3: library part LMR62421XMFE/NOPB, "Switching Voltage Regulators SIMPLE SWITCHER 24V out,2.1A SU Vltg Reg"
*Buck1 *Buck2: "step down converter"
*CS1: "Single Channel, High Side Current Sense, 60 V Supply Operation, Precision Operational Amplifier, 0.115 MHz Typical GBW, 2.5 to 60 V, 8-Pin SOIC (S8-8), Commercial, Pb-Free, Reel"
*CS2 *CS3 *CS4 *CS5 *CS6 *CS7: library part LT6106HS5#TRMPBF, "Single Channel, Low Cost, High Side Current Sense Operational Amplifier, 0.2 MHz Typical GBW, 5-Pin SOT-23 (S5-5), High Temperature / Automotive, Pb-Free, Mini Reel"
*CS8 *CS9: "Single Channel, Low Cost, High Side Current Sense Operational Amplifier, 0.2 MHz Typical GBW, 5-Pin SOT-23 (S5-5), High Temperature / Automotive, Pb-Free, Mini Reel"
*KillSW1 *SepSW1 M1 M2 M3 M4 M5: "P-MOSFET, DUAL PCh -12V 9.2A"
*OverCP1 *OverCP2 *OverCP3 *OverCP4 *OverCP5 *OverCP6: "Overvoltage / Overcurrent Protection Controller, 2.5 to 80 V Vin, 8-pin SOT23 (TS8-8), -40 to 85 degC, Pb-Free, Mini Tape and Reel"
*OverCP7 *OverCP8: library part LTC4361ITS8-1#TRMPBF, "Overvoltage / Overcurrent Protection Controller, 2.5 to 80 V Vin, 8-pin SOT23 (TS8-8), -40 to 85 degC, Pb-Free, Mini Tape and Reel"
*Relay: library part "Omron G6SK-2G", "RELAY TELECOM DPDT 2A 3V"
ADC1 ADC2: "Analog  to Digital Converter, 10BIT 8 Channel"
BJT1 BJT2: library part 2STF1360, "BJT, NPN"
BJT3 BJT4 BJT5 BJT6 BJT7 BJT8: library part 2STF1360, "BJT"
C1: "Ceramic Capacitor 47uF 0603"
C2 C35: library part GRM155R71H103KA8, "Ceramic Capacitor 0402"
C3 C7 C9 C13 C15 C19: "Ceramic Capacitor 0402"
C4 C8 C10 C14 C16 C20: library part GRM155R71H103KA8, "Ceramic Capacitor"
C5 C6 C11 C12 C17 C18: library part GRM188R71H472KA0, "Ceramic Capacitor 47uF 0603"
C21 C28: library part TAJB226M010RNJ, "Tantalum Capacitor, 22uF"
C22 C23 C29 C30: library part C0805C106K8PACTU, "Ceramic Capacitor 10uF"
C24: library part TAJB226M010RNJ, "Tantalum Capacitor. 100uF"
C25 C31: library part TAJB226M010RNJ, "Tantalum Capacitor, 100uF"
C26 C33: library part GRM155R71H103KA8, "Ceramic Capacitor 10nF"
C27 C34: library part GRM188R61C105KA9, "Ceramic Capacitor 1uF"
C32: library part TAJB226M010RNJ, "Tantalum Capacitor,100uF"
C36: library part GRM155R71H103KA8, "Ceramic Capacitor 1uF"
C37 C38: library part GRM155R71H103KA8, "Ceramic Capacitor 22uF"
CN1 CN2 CN5 CN7 CN8 CN11 CN12: library part 2Pin_Connector, "CONN HEADER SH 2POS SIDE 1MM TIN"
CN3 CN4 CN6 CN9 CN10 CN13 CN14: library part 3PIN_Connector, "CONN HEADER SH 3POS SIDE 1MM TIN"
CR1: library part ABM3B-16.000MHZ-10-1-U-T, "CRYSTAL 16.0000MHZ 10PF SMD"
D1 D2: "Diode General Purpose, SOD-123"
D3 D4 D5 D6 D7 D8 D9 D10 D11 D12 D13 D14 D15 D16 D18: "Schottky Diode, 1A"
D17: "Schottky Diode, 3A"
FX1 FX2 FX3 FX4: "Header, 9-Pin"
H1: "2x20 way standard long pin PCB socket Samtec ESQ Series 2.54mm 40 Way 2 Row Straight PCB Socket Through Hole Board to Board"
L1 L2 L3 L4 L5: library part SPM6530T-4R7M, "Inductor, 4.7uH"
ORG1 ORG2: "OR GATE, 4 Channels"
R1 R2 R3 R4 R5 R6 R7 R8 R9 R10 R11 R13 R16 R18 R19 R21 R22 R23 R24 R33 R35 R36 R37 R38 R47 R49 R50 R51 R52 R66 R68 R76 R78 R95 R96 R97: library part RC0805FR, "Thick Film Resistors 0805"
R12 R17 R67 R77: library part RL0805FR-070R1L, "Sense Resistor 100m ohm 0805"
R14 R15 R20 R25 R27 R28 R29 R30 R32 R34 R39 R41 R42 R43 R44 R46 R48 R53 R55: "Thick Film Resistors 0805"
R26 R31 R40 R45 R54 R69 R70 R71 R87 R88 R89 R93 R94: "Sense Resistor 100m ohm 0805"
R56 R57 R58 R63 R73 R81 R82 R83: library part RC0805FR, "Thick Film Resistors, 1k ohm"
R59 R60 R61 R72 R84 R85 R86: library part RC0805FR, "Thick Film Resistors, 10k ohm"
R62 R90 R92: library part RC0805FR, "Thick Film Resistors 10k ohm"
R64: library part RC0805FR, "Thick Film Resistors, 1.6kohm"
R65 R75: library part RC0805FR, "Thick Film Resistors, 150 ohm"
R74: library part RC0805FR, "Thick Film Resistors, 3k ohm"
R79: library part RC0805FR, "Resistors 0805, 4.7k ohm"
R80: library part RC0805FR, "Resistors 0805, 15k ohm"
R91: library part RC0805FR, "Thick Film Resistors 10kohm"
U1: "8-bit AVR Microcontroller, 4.5-5.5V, 256KB Flash, 4KB EEPROM, 8KB SRAM, 86 GPIO pins, 100-pin TQFP, Industrial Grade (-40°C to 85°C), Pb-Free"
Vref1 Vref2: library part ADR3412ARJZ-R2, "Voltage Reference"
W1 W2 W3 W4 W5 W6 W7 W8 W9 W10 W11 W12 W13 W14 W15 W16 W17 W18 W19 W20 W21 W22: "Jumper Wire"

## Via types
v1: diameter 0.6, hole 0.3, Top Layer to Bottom Layer, 3 vias

## Nets (pads, with @x,y where several pads share a name; then routed paths per layer and width w, separated by ;. In a path a pad name is that pad's centre, name@x,y a point inside that pad or via, vN(x,y) a via of type N, cw(c..) or ccw(c..) an arc to the next point about the centre after c; other vN are vias at no path point)
CONV_X_OUT: C6.2 C7.2 C8.2 D5.2 R21.1 R23.1 R25.2 R26.2
CONV_Y_OUT: C12.2 C13.2 C14.2 D10.2 R35.1 R37.1 R39.2 R40.2
CONV_Z_OUT: C18.2 C19.2 C20.2 D15.2 R49.1 R51.1 R53.2 R54.2
DRAIN6: *OverCP4.6 M3.5 M3.6 R87.1
DRAIN_2: *OverCP1.6 M1.5 M1.6 R69.1
EPS_3.3V_VCC: *OverCP7.2 H1.10 M4.1 M4.3
EPS_5V_VCC: *CS2.5 *CS3.5 *CS4.5 *CS5.5 *CS6.5 *CS7.5 *CS8.5 *CS9.5 *OverCP8.2 *Relay.1 *Relay.6 ADC1.16 ADC2.16 CN3.1 CN4.1 CN6.1 CN9.1 CN10.1 CN13.1 CN14.1 D1.2 D2.2 H1.8 M5.1 M5.3 ORG1.14 ORG2.14 R5.1 R59.1 R60.1 R61.1 R84.1 R85.1 R86.1 R90.1 R91.2 R92.2 U1.10 U1.31 U1.61 U1.80 U1.100 Vref1.6 Vref2.6 W20.1
  other v1: 74.498,38.76
GND: *Boost1.2 *Boost2.2 *Boost3.2 *Buck1.4 *Buck1.8 *Buck2.4 *Buck2.8 *CS1.4 *CS2.2 *CS3.2 *CS4.2 *CS5.2 *CS6.2 *CS7.2 *CS8.2 *CS9.2 *OverCP1.4 *OverCP2.4 *OverCP3.4 *OverCP4.4 *OverCP5.4 *OverCP6.4 *OverCP7.1 *OverCP7.4 *OverCP8.1 *OverCP8.4 *Relay.4 *Relay.9 ADC1.9 ADC1.14 ADC2.9 ADC2.14 BJT1.3 BJT2.3 BJT3.3 BJT4.3 BJT5.3 BJT6.3 BJT7.3 BJT8.3 C1.1 C2.1 C3.1 C4.1 C5.1 C6.1 C7.1 C9.1 C10.1 C11.1 C12.1 C13.1 C15.1 C16.1 C17.1 C18.1 C19.1 C21.2 C22.1 C23.1 C24.2 C25.2 C27.1 C28.2 C29.1 C30.1 C31.2 C32.2 C34.1 C35.1 C36.1 C37.1 C38.1 CN1.2 CN1.3 CN1.4 CN2.2 CN2.3 CN2.4 CN3.3 CN3.4 CN3.5 CN4.3 CN4.4 CN4.5 CN5.2 CN5.3 CN5.4 CN6.3 CN6.4 CN6.5 CN7.2 CN7.3 CN7.4 CN8.2 CN8.3 CN8.4 CN9.3 CN9.4 CN9.5 CN10.3 CN10.4 CN10.5 CN11.2 CN11.3 CN11.4 CN12.2 CN12.3 CN12.4 CN13.3 CN13.4 CN13.5 CN14.3 CN14.4 CN14.5 CR1.2 CR1.4 D17.1 D18.1 FX1.1 FX1.2 FX1.3 FX1.4 FX1.5 FX1.6 FX1.7 FX1.8 FX1.9 FX2.1 FX2.2 FX2.3 FX2.4 FX2.5 FX2.6 FX2.7 FX2.8 FX2.9 FX3.1 FX3.2 FX3.3 FX3.4 FX3.5 FX3.6 FX3.7 FX3.8 FX3.9 FX4.1 FX4.2 FX4.3 FX4.4 FX4.5 FX4.6 FX4.7 FX4.8 FX4.9 H1.11 H1.12 H1.19 H1.29 H1.30 H1.31 H1.32 H1.45 H1.46 ORG1.2 ORG1.5 ORG1.7 ORG1.10 ORG1.13 ORG2.2 ORG2.5 ORG2.7 R10.2 R15.2 R18.2 R22.2 R24.2 R27.2 R29.2 R32.2 R36.2 R38.2 R41.2 R43.2 R46.2 R50.2 R52.2 R55.2 R62.2 R63.2 R68.2 R72.2 R73.2 R78.2 R79.1 U1.11 U1.32 U1.62 U1.81 U1.99 Vref1.2 Vref1.3 Vref1.5 Vref2.2 Vref2.3 Vref2.5 W2.1 W4.1 W16.2 W18.2 W19.2
ISA_X: *CS2.1 ADC1.3 R18.1
ISA_Y: *CS4.1 ADC1.4 R32.1
ISA_Z: *CS6.1 ADC1.5 R46.1
LOAD1_STATUS: *OverCP3.1 ORG1.3
LOAD2_STATUS: *OverCP1.1 ORG1.6
LOAD3_STATUS: *OverCP2.1 ORG1.8
LOAD5_STATUS: *OverCP5.1 ORG2.3
LOAD6_STATUS: *OverCP4.1 ORG2.6
M_VSA_X: ADC2.8 R14.2 R15.1
M_VSA_Y: ADC1.1 R28.2 R29.1
M_VSA_Z: ADC1.2 R42.2 R43.1
MISO: U1.22 W16.1
MOSI: U1.21 W18.1
Net*Battery1_1: *Battery1.1 *CS1.2 H1.17 R12.1
Net*Battery1_2: *Battery1.2 W3.2
Net*Battery2_3: *Battery2.3 *Battery2.4
Net*Boost1_1: *Boost1.1 D5.1 L1.1
Net*Boost1_3: *Boost1.3 C8.1 R21.2 R22.1 W5.2
Net*Boost1_4: *Boost1.4 R19.1
Net*Boost1_5: *Boost1.5 *CS2.4 C3.2 C4.2 L1.2 R17.1 R19.2
Net*Boost2_1: *Boost2.1 D10.1 L2.1
Net*Boost2_3: *Boost2.3 C14.1 R35.2 R36.1 W7.2
Net*Boost2_4: *Boost2.4 R33.1
Net*Boost2_5: *Boost2.5 *CS4.4 C9.2 C10.2 L2.2 R31.1 R33.2
Net*Boost3_1: *Boost3.1 D15.1 L3.1
Net*Boost3_3: *Boost3.3 C20.1 R49.2 R50.1 W9.2
Net*Boost3_4: *Boost3.4 R47.1
Net*Boost3_5: *Boost3.5 *CS6.4 C15.2 C16.2 L3.2 R45.1 R47.2
Net*Buck1_1: *Buck1.1 C26.2 D17.2 L4.1
Net*Buck1_2: *Buck1.2 C21.1 C22.2 C23.2 W11.2
Net*Buck1_3: *Buck1.3 C26.1
Net*Buck1_5: *Buck1.5 R62.1
Net*Buck1_6: *Buck1.6 R63.1 R64.2
Net*Buck1_7: *Buck1.7 C27.2
Net*Buck2_1: *Buck2.1 C33.2 D18.2 L5.1
Net*Buck2_2: *Buck2.2 C28.1 C29.2 C30.2 W13.2
Net*Buck2_3: *Buck2.3 C33.1
Net*Buck2_5: *Buck2.5 R72.1
Net*Buck2_6: *Buck2.6 R73.1 R74.2
Net*Buck2_7: *Buck2.7 C34.2
Net*CS1_5: *CS1.5 U1.85
Net*CS1_6: *CS1.6 C2.2 Vref1.1
Net*CS1_7: *CS1.7 *KillSW1.5 *KillSW1.6 *KillSW1.7 *KillSW1.8 *SepSW1.1 *SepSW1.3 C1.2 R9.1 R12.2 R13.1
Net*CS2_3: *CS2.3 R16.1
Net*CS3_1: *CS3.1 R27.1 U1.89
Net*CS3_3: *CS3.3 R25.1
Net*CS3_4: *CS3.4 D6.1 R26.1
Net*CS4_3: *CS4.3 R30.1
Net*CS5_1: *CS5.1 R41.1 U1.88
Net*CS5_3: *CS5.3 R39.1
Net*CS5_4: *CS5.4 D11.1 R40.1
Net*CS6_3: *CS6.3 R44.1
Net*CS7_1: *CS7.1 R55.1 U1.87
Net*CS7_3: *CS7.3 R53.1
Net*CS7_4: *CS7.4 D16.1 R54.1
Net*CS8_1: *CS8.1 R68.1 U1.95
Net*CS8_3: *CS8.3 R66.1
Net*CS8_4: *CS8.4 R67.1 U1.94 W12.1
Net*CS9_1: *CS9.1 R78.1 U1.91
Net*CS9_3: *CS9.3 R76.1
Net*CS9_4: *CS9.4 R77.1 W14.1
Net*KillSW1_1: *KillSW1.1 *KillSW1.3 R4.1 W1.2
Net*KillSW1_2: *KillSW1.2 *KillSW1.4 R6.2
Net*OverCP1_2: *OverCP1.2 H1.28 M1.3
Net*OverCP1_3: *OverCP1.3 *OverCP1.5 *OverCP2.3 *OverCP2.5 *OverCP3.3 *OverCP3.5 *OverCP7.3 *OverCP7.5 R69.2 R70.2 R71.2 R93.2 W12.2
Net*OverCP1_7: *OverCP1.7 M1.4
Net*OverCP2_2: *OverCP2.2 H1.20 M2.1
Net*OverCP2_6: *OverCP2.6 M2.7 M2.8 R71.1
Net*OverCP2_7: *OverCP2.7 M2.2
Net*OverCP3_2: *OverCP3.2 H1.18 M1.1
Net*OverCP3_6: *OverCP3.6 M1.7 M1.8 R70.1
Net*OverCP3_7: *OverCP3.7 M1.2
Net*OverCP4_2: *OverCP4.2 H1.26 M3.3
Net*OverCP4_3: *OverCP4.3 *OverCP4.5 *OverCP5.3 *OverCP5.5 *OverCP6.3 *OverCP6.5 *OverCP8.3 *OverCP8.5 R80.2 R87.2 R88.2 R89.2 R94.2 W14.2
Net*OverCP4_7: *OverCP4.7 M3.4
Net*OverCP5_2: *OverCP5.2 H1.24 M3.1
Net*OverCP5_6: *OverCP5.6 M3.7 M3.8 R88.1
Net*OverCP5_7: *OverCP5.7 M3.2
Net*OverCP6_1: *OverCP6.1 ORG1.11
Net*OverCP6_2: *OverCP6.2 H1.22 M2.3
Net*OverCP6_6: *OverCP6.6 M2.5 M2.6 R89.1
Net*OverCP6_7: *OverCP6.7 M2.4
Net*OverCP7_6: *OverCP7.6 M4.5 M4.6 M4.7 M4.8 R93.1
Net*OverCP7_7: *OverCP7.7 M4.2 M4.4
Net*OverCP8_6: *OverCP8.6 M5.5 M5.6 M5.7 M5.8 R94.1
Net*OverCP8_7: *OverCP8.7 M5.2 M5.4
Net*Relay_2: *Relay.2 D1.1 R2.2
Net*Relay_3: *Relay.3 *Relay.10 R3.2
Net*Relay_5: *Relay.5 *Relay.8 R5.2 U1.37
Net*Relay_7: *Relay.7 D2.1 R7.1
Net*SepSW1_2: *SepSW1.2 *SepSW1.4 R11.2 R13.2
Net*SepSW1_5: *SepSW1.5 *SepSW1.6 *SepSW1.7 *SepSW1.8 W11.1 W13.1
NetADC1_10: ADC1.10 U1.54
NetADC1_11: ADC1.11 U1.55
NetADC1_12: ADC1.12 U1.56
NetADC1_13: ADC1.13 U1.53
NetADC2_10: ADC2.10 U1.58
NetADC2_11: ADC2.11 U1.59
NetADC2_12: ADC2.12 U1.60
NetADC2_13: ADC2.13 U1.57
NetB1_41: H1.41 U1.44 W22.2
NetB1_43: H1.43 U1.43 W21.2
NetBJT1_1: BJT1.1 R1.1
NetBJT1_2: BJT1.2 R2.1
NetBJT2_1: BJT2.1 R8.1
NetBJT2_2: BJT2.2 R7.2
NetBJT3_1: BJT3.1 R56.1
NetBJT4_1: BJT4.1 R57.1
NetBJT5_1: BJT5.1 R58.1
NetBJT6_1: BJT6.1 R81.1
NetBJT7_1: BJT7.1 R82.1
NetBJT8_1: BJT8.1 R83.1
NetBJT8_2: BJT8.2 ORG1.12 R86.2
NetC5_2: C5.2 D4.1 R20.1
NetC11_2: C11.2 D9.1 R34.1
NetC17_2: C17.2 D14.1 R48.1
NetC24_1: C24.1 C25.1 L4.2 R65.1 R66.2 R67.2
NetC31_1: C31.1 C32.1 L5.2 R75.1 R76.2 R77.2
NetC36_2: C36.2 R90.2 W15.2
NetC37_2: C37.2 CR1.3 U1.34
NetC38_2: C38.2 CR1.1 U1.33
NetCN1_1: CN1.1 R11.1 W2.2
NetCN2_1: CN2.1 W3.1 W4.2
NetCN5_1: CN5.1 D3.1
NetCN7_1: CN7.1 D7.1
NetCN8_1: CN8.1 D8.1
NetCN11_1: CN11.1 D12.1
NetCN12_1: CN12.1 D13.1
NetD4_2: D4.2 R95.1
NetD6_2: D6.2 W6.1
NetD9_2: D9.2 R96.1
NetD11_2: D11.2 W8.1
NetD14_2: D14.2 R97.1
NetD16_2: D16.2 W10.1
NetR1_2: R1.2 U1.35
NetR3_1: R3.1 R4.2 R6.1
NetR8_2: R8.2 U1.36
NetR9_2: R9.2 R10.1 U1.86
NetR20_2: R20.2 U1.17
NetR34_2: R34.2 U1.18
NetR48_2: R48.2 U1.15
NetR56_2: R56.2 U1.78
NetR57_2: R57.2 U1.77
NetR58_2: R58.2 U1.76
NetR64_1: R64.1 R65.2
NetR74_1: R74.1 R75.2
NetR79_2: R79.2 R80.1 U1.90
NetR81_2: R81.2 U1.74
NetR82_2: R82.2 U1.73
NetR83_2: R83.2 U1.75
NetR91_1: R91.1 W21.1
NetR92_1: R92.1 W22.1
NetR95_2: R95.2 W5.1
NetR96_2: R96.2 W7.1
NetR97_2: R97.2 W9.1
NetW1_1: W1.1 W6.2 W8.2 W10.2
OR1: BJT3.2 ORG1.1 R59.2
OR2: BJT4.2 ORG1.4 R60.2
OR3: BJT5.2 ORG1.9 R61.2
OR5: BJT6.2 ORG2.1 R84.2
OR6: BJT7.2 ORG2.4 R85.2
R: U1.30 W15.1 W17.1
RX0: U1.2 W19.1
SCK: U1.20 W17.2
TBATTERY_1: ADC2.6 CN3.2
TBATTERY_2: ADC2.7 CN4.2
TSA_X: ADC2.1 CN6.2
TSA_Y+: ADC2.2 CN9.2
TSA_Y-: ADC2.3 CN10.2
TSA_Z+: ADC2.4 CN13.2
TSA_Z-: ADC2.5 CN14.2
TX0: U1.3 W20.2
VDC_X: ADC1.6 R23.2 R24.1
VDC_Y: ADC1.7 R37.2 R38.1
VDC_Z: ADC1.8 R51.2 R52.1
VREF_5: ADC1.15 ADC2.15 C35.2 U1.98 Vref2.1
VSA_X: D3.2 R14.1 R16.2 R17.2
VSA_Y: D7.2 D8.2 R28.1 R30.2 R31.2
VSA_Z: D12.2 D13.2 R42.1 R44.2 R45.2
pads on no net: *Battery1.3 *Battery1.4 *Battery2.5 *Battery2.6 *Battery2.7 *CS1.1 *CS1.3 *CS1.8 *OverCP1.8 *OverCP2.8 *OverCP3.8 *OverCP4.8 *OverCP5.8 *OverCP6.8 *OverCP7.8 *OverCP8.8 H1.1 H1.2 H1.3 H1.4 H1.5 H1.6 H1.7 H1.9 H1.13 H1.14 H1.15 H1.16 H1.21 H1.23 H1.25 H1.27 H1.33 H1.34 H1.35 H1.36 H1.37 H1.38 H1.39 H1.40 H1.42 H1.44 H1.47 H1.48 H1.49 H1.50 H1.51 H1.52 ORG2.8 ORG2.9 ORG2.10 ORG2.11 ORG2.12 ORG2.13 U1.1 U1.4 U1.5 U1.6 U1.7 U1.8 U1.9 U1.12 U1.13 U1.14 U1.16 U1.19 U1.23 U1.24 U1.25 U1.26 U1.27 U1.28 U1.29 U1.38 U1.39 U1.40 U1.41 U1.42 U1.45 U1.46 U1.47 U1.48 U1.49 U1.50 U1.51 U1.52 U1.63 U1.64 U1.65 U1.66 U1.67 U1.68 U1.69 U1.70 U1.71 U1.72 U1.79 U1.82 U1.83 U1.84 U1.92 U1.93 U1.96 U1.97 Vref1.4 Vref2.4
copper on no net:
  other v1: 65.38,36.195 66.421,38.303

## Polygon pours and split planes (outlines as drawn)
no net on Ground (split plane): 175 vertices, not listed, extent -4.401,-4.541 90.031,84.741

## Silkscreen, mask and mechanical layers (free items; w line width, h text height)
Mechanical 1:
  lines w0.254: 88.63,67.85 88.63,10.15 ccw(c89.728,10.15) 88.952,9.373 89.625,8.7 90.162,8.163 cw(c89.248,7.25) 90.54,7.25 90.54,-1.77 cw(c89.54,-1.77) 89.54,-2.77 61.02,-2.77 ccw(c61.02,-3.989) 60.158,-3.127 58.592,-4.693 cw(c57.73,-3.831) 57.73,-5.05 5.24,-5.05 cw(c5.24,-3.432) 4.096,-4.576 4.044,-4.524 ccw(c2.9,-5.668) 2.9,-4.05 -3.91,-4.05 cw(c-3.91,-3.05) -4.91,-3.05 -4.91,83.25 cw(c-3.91,83.25) -3.91,84.25 4.75,84.25 4.888,84.25 ccw(c4.888,85.957) 6.095,84.75 cw(c7.302,83.543) 7.302,85.25 7.44,85.25 74.82,85.25 cw(c74.82,82.57) 76.715,84.465 79.855,81.325 ccw(c81.75,83.22) 81.75,80.54 89.49,80.54 cw(c89.49,79.54) 90.49,79.54 90.49,71.67 cw(c88.124,71.67) 89.797,69.997 89.323,69.523

## Text inside footprints (layer, text, board x,y; h text height)
*Buck1: Top Overlay "*" at 32.499,20.371 h1.27 r90; Mechanical 13 "*" at 28.905,21.641 h1.27 r90
*Buck2: Top Overlay "*" at 32.525,45.517 h1.27 r90; Mechanical 13 "*" at 28.931,46.787 h1.27 r90
L1: Top Overlay "*" at 11.297,70.485 h1.27 r180; Mechanical 13 "*" at 9.773,70.485 h1.27 r180
L2: Top Overlay "*" at 2.241,32.944 h1.27; Mechanical 13 "*" at 3.765,32.944 h1.27
L3: Top Overlay "*" at 11.5,11.227 h1.27 r180; Mechanical 13 "*" at 9.976,11.227 h1.27 r180
L4: Top Overlay "*" at 77.978,39.63 h1.27 r90; Mechanical 13 "*" at 77.978,41.154 h1.27 r90
L5: Top Overlay "*" at 77.876,58.096 h1.27 r90; Mechanical 13 "*" at 77.876,59.62 h1.27 r90
ORG1: Mechanical 13 "*" at 53.835,60.909 h1.27 r180; Bottom Overlay "*" at 52.68,59.639 h1.27 r180
ORG2: Mechanical 13 "*" at 59.753,28.321 h1.27; Bottom Overlay "*" at 60.909,29.591 h1.27
Vref1: Mechanical 13 "*" at 46.647,8.722 h1.27; Bottom Overlay "*" at 48.387,9.322 h1.27
Vref2: Mechanical 13 "*" at 27.191,41.087 h1.27 r180; Bottom Overlay "*" at 26.365,40.122 h1.27 r180